# EAGLE board BasePCB_V_1_0 (EAGLE 9.5.2)

Size 100 x 100 mm. Coordinates in mm from the lower left corner, seen from the top.
Outline: 0,0 100,0 100,100 0,100 0,0
Copper layers (1*16): Top 0.035mm / dielectric 1.5mm / Bottom 0.035mm
Design rules "default": minimum track width 6mil, minimum drill 0.35mm, track to track 6mil, track to pad 6mil, pad to pad 6mil, via to via 6mil, smd to smd 6mil, copper to edge 40mil, drill to drill 6mil, minimum pad ring 10mil, minimum via ring 8mil, stop-mask expansion 4mil, vias tented up to drill 0mil, thermal gap 10mil
Holes 4 mm at 4,4 5.4,95.1 93.4,96.3 91.8,3.6

## Footprints (pad centres in the part's own frame; a part is rotated, then mirrored left to right if it is on the bottom)
C1206 = smd 0.62 x 1.82: 1 -1.6,0; 2 1.6,0
C0603 = smd 1.1 x 1: 1 -0.85,0; 2 0.85,0
MOLEX_90814-0204 = smd 1.194 x 2.007: 1 0.254,0; 2 1.27,5.994; 3 2.54,0; 4 3.81,5.994 | drill 1.753 pad 2.629: 5 -1.93,1.092; 6 5.74,1.092
QFP80P900X900X160-32N = smd 1.475 x 0.6: 1 -4.238,2.8; 2 -4.238,2; 3 -4.238,1.2; 4 -4.238,0.4; 5 -4.238,-0.4; 6 -4.238,-1.2; 7 -4.238,-2; 8 -4.238,-2.8; 17 4.238,-2.8; 18 4.238,-2; 19 4.238,-1.2; 20 4.238,-0.4; 21 4.238,0.4; 22 4.238,1.2; 23 4.238,2; 24 4.238,2.8 | smd 0.6 x 1.475: 9 -2.8,-4.238; 10 -2,-4.238; 11 -1.2,-4.238; 12 -0.4,-4.238; 13 0.4,-4.238; 14 1.2,-4.238; 15 2,-4.238; 16 2.8,-4.238; 25 2.8,4.238; 26 2,4.238; 27 1.2,4.238; 28 0.4,4.238; 29 -0.4,4.238; 30 -1.2,4.238; 31 -2,4.238; 32 -2.8,4.238
SOP50P490X110-10N = smd 1.4 x 0.3: 1 -2.2,1; 2 -2.2,0.5; 3 -2.2,0; 4 -2.2,-0.5; 5 -2.2,-1; 6 2.2,-1; 7 2.2,-0.5; 8 2.2,0; 9 2.2,0.5; 10 2.2,1
1001878410210TLF = drill 0.78 pad 1.337: A1 0,1.27; A2 1,3.27; A3 2,1.27; A4 3,3.27; A5 4,1.27; A6 5,3.27; A7 6,1.27; A8 7,3.27; A9 8,1.27; A10 9,3.27; A11 10,1.27; A12 13,3.27; A13 14,1.27; A14 15,3.27; A15 16,1.27; A16 17,3.27; A17 18,1.27; A18 19,3.27; B1 0,-1.23; B2 1,-3.23; B3 2,-1.23; B4 3,-3.23; B5 4,-1.23; B6 5,-3.23; B7 6,-1.23; B8 7,-3.23; B9 8,-1.23; B10 9,-3.23; B11 10,-1.23; B12 13,-3.23; B13 14,-1.23; B14 15,-3.23; B15 16,-1.23; B16 17,-3.23; B17 18,-1.23; B18 19,-3.23 | hole 2.4: 11.65,0.02; 20.8,0.02
R0603 = smd 1 x 1.1: 1 -0.85,0; 2 0.85,0

## Placement (x,y rotation side)
C15  10 uF  [C1206]  -64.6,-625.1 0 top  (outside the outline)
C16  100 nF  [C0603]  -88.9,-591 0 top  (outside the outline)
C17  100 nF  [C0603]  -88.9,-487.68 0 top  (outside the outline)
C18  10 uF  [C1206]  -68.58,-473.71 0 top  (outside the outline)
C20  10 uF  [C1206]  -86.5,-514.8 0 top  (outside the outline)
C21  100 nF  [C0603]  -88.9,-518 0 top  (outside the outline)
C22  10 uF  [C1206]  -87.6,-526.3 0 top  (outside the outline)
C23  100 nF  [C0603]  -88.9,-522.6 0 top  (outside the outline)
C24  10 uF  [C1206]  -87.6,-546.8 0 top  (outside the outline)
C25  100 nF  [C0603]  -82.7,-534.5 0 top  (outside the outline)
C26  10 uF  [C1206]  -82,-546.8 0 top  (outside the outline)
C27  100 nF  [C0603]  -88.9,-539.4 0 top  (outside the outline)
C28  10 uF  [C1206]  -87.6,-567.3 0 top  (outside the outline)
C29  100 nF  [C0603]  -82.7,-555 0 top  (outside the outline)
C30  10 uF  [C1206]  -82,-567.3 0 top  (outside the outline)
C31  100 nF  [C0603]  -88.9,-559.9 0 top  (outside the outline)
C32  10 uF  [C1206]  -87.6,-587.8 0 top  (outside the outline)
C33  100 nF  [C0603]  -82.7,-575.5 0 top  (outside the outline)
C34  10 uF  [C1206]  -82,-587.8 0 top  (outside the outline)
C35  100 nF  [C0603]  -88.9,-580.4 0 top  (outside the outline)
C36  100 nF  [C0603]  -76.5,-605.4 0 top  (outside the outline)
C37  10 uF  [C1206]  -87.6,-628.8 0 top  (outside the outline)
C38  100 nF  [C0603]  -70.7,-605.4 0 top  (outside the outline)
C39  10 uF  [C1206]  -82,-628.8 0 top  (outside the outline)
C40  100 nF  [C0603]  -64.9,-605.4 0 top  (outside the outline)
C41  10 uF  [C1206]  -76.4,-628.8 0 top  (outside the outline)
C42  100 nF  [C0603]  -88.9,-610.3 0 top  (outside the outline)
C43  10 uF  [C1206]  -70.8,-628.8 0 top  (outside the outline)
C44  100 nF  [C0603]  -83.1,-610.3 0 top  (outside the outline)
C45  10 uF  [C1206]  -65.2,-628.8 0 top  (outside the outline)
C46  100 nF  [C0603]  -77.3,-610.3 0 top  (outside the outline)
C47  10 uF  [C1206]  -87.6,-631.1 0 top  (outside the outline)
C48  100 nF  [C0603]  -71.5,-610.3 0 top  (outside the outline)
C49  10 uF  [C1206]  -82,-631.1 0 top  (outside the outline)
C50  100 nF  [C0603]  -65.7,-610.3 0 top  (outside the outline)
I2C-CONN  90814-0204  [MOLEX_90814-0204]  -81.28,-435.61 0 top  (outside the outline)
IC6  STM32F031K6T6  [QFP80P900X900X160-32N]  -82.55,-466.09 0 top  (outside the outline)
IC7  DAC084S085CIMM_NOPB  [SOP50P490X110-10N]  -78.9,-497 0 top  (outside the outline)
IC8  DAC084S085CIMM_NOPB  [SOP50P490X110-10N]  -78.9,-543.7 0 top  (outside the outline)
IC9  DAC084S085CIMM_NOPB  [SOP50P490X110-10N]  -78.9,-564.2 0 top  (outside the outline)
IC10  DAC084S085CIMM_NOPB  [SOP50P490X110-10N]  -78.9,-584.7 0 top  (outside the outline)
IC11  DAC084S085CIMM_NOPB  [SOP50P490X110-10N]  29.1,27.2 0 top
IC12  DAC084S085CIMM_NOPB  [SOP50P490X110-10N]  44.2,43.9 0 top
IC13  DAC084S085CIMM_NOPB  [SOP50P490X110-10N]  44.2,40.2 0 top
IC15  DAC084S085CIMM_NOPB  [SOP50P490X110-10N]  44.2,36.5 0 top
J1  90814-0204  [MOLEX_90814-0204]  -66.04,-246.38 0 top  (outside the outline)
J2  90814-0204  [MOLEX_90814-0204]  -66.04,-264.16 0 top  (outside the outline)
J3  10018784-10210TLF  [1001878410210TLF]  60,75 90 top
J4  10018784-10210TLF  [1001878410210TLF]  40,75 90 top
J5  10018784-10210TLF  [1001878410210TLF]  40,25 270 top
J6  10018784-10210TLF  [1001878410210TLF]  20,75 90 top
J7  10018784-10210TLF  [1001878410210TLF]  20,25 270 top
J8  10018784-10210TLF  [1001878410210TLF]  80,25 270 top
J9  10018784-10210TLF  [1001878410210TLF]  60,25 270 top
J10  10018784-10210TLF  [1001878410210TLF]  80,75 90 top
PRG-CONN  90814-0204  [MOLEX_90814-0204]  -81.28,-453.39 0 top  (outside the outline)
R36  10k  [R0603]  -72.39,-463.55 0 top  (outside the outline)
R37  10k  [R0603]  -67.31,-463.55 0 top  (outside the outline)
R39  10k  [R0603]  -88.9,-492.76 0 top  (outside the outline)
R42  500 R  [R0603]  -88.9,-501.3 0 top  (outside the outline)
R45  500 R  [R0603]  -88.9,-506.2 0 top  (outside the outline)
R46  500 R  [R0603]  -88.9,-511.1 0 top  (outside the outline)
R47  500 R  [R0603]  -88.9,-529.9 0 top  (outside the outline)
R48  500 R  [R0603]  -82.7,-529.9 0 top  (outside the outline)
R49  500 R  [R0603]  -88.9,-534.8 0 top  (outside the outline)
R50  500 R  [R0603]  -88.9,-550.4 0 top  (outside the outline)
R51  500 R  [R0603]  -82.7,-550.4 0 top  (outside the outline)
R52  500 R  [R0603]  -88.9,-555.3 0 top  (outside the outline)
R53  500 R  [R0603]  -88.9,-570.9 0 top  (outside the outline)
R54  500 R  [R0603]  -82.7,-570.9 0 top  (outside the outline)
R55  500 R  [R0603]  -88.9,-575.8 0 top  (outside the outline)
R56  500 R  [R0603]  -88.9,-595.9 0 top  (outside the outline)
R57  500 R  [R0603]  -82.7,-595.9 0 top  (outside the outline)
R62  500 R  [R0603]  -76.5,-595.9 0 top  (outside the outline)
R64  500 R  [R0603]  -70.3,-595.9 0 top  (outside the outline)
R65  500 R  [R0603]  -64.1,-595.9 0 top  (outside the outline)
R66  500 R  [R0603]  -88.9,-600.8 0 top  (outside the outline)
R69  500 R  [R0603]  -82.7,-600.8 0 top  (outside the outline)
R71  500 R  [R0603]  -76.5,-600.8 0 top  (outside the outline)
R73  500 R  [R0603]  -70.3,-600.8 0 top  (outside the outline)
R74  500 R  [R0603]  -64.1,-600.8 0 top  (outside the outline)
R75  500 R  [R0603]  -88.9,-605.7 0 top  (outside the outline)
R76  500 R  [R0603]  -82.7,-605.7 0 top  (outside the outline)

## Library data of the parts
C15-C18 C20-C50 R36 R37 R39 R42 R45-R57 R62 R64-R66 R69 R71 R73-R76 = passive components
I2C-CONN J1 J2 PRG-CONN = electro_mechanical; DESCRIPTION: CONN HEADER 4POS 1.27MM SMD TIN; HEIGHT: mm; MANUFACTURER_NAME: Molex; MANUFACTURER_PART_NUMBER: 90814-0204; MOUSER_PART_NUMBER: 538-90814-0204; MOUSER_PRICE-STOCK: https://www.mouser.com/Search/Refine.aspx?Keyword=538-90814-0204
IC6 = C_Sager_Bibliothek; DESCRIPTION: ARM Microcontrollers - MCU 16/32-BITS MICROS; HEIGHT: 1.6mm; MANUFACTURER_NAME: STMicroelectronics; MANUFACTURER_PART_NUMBER: STM32F031K6T6; MOUSER_PART_NUMBER: 511-STM32F031K6T6; MOUSER_PRICE-STOCK: https://www.mouser.com/Search/Refine.aspx?Keyword=511-STM32F031K6T6
IC7-IC13 IC15 = SPI; MOUSER_PART_NUMBER: 926-DAC084S085CIMMNO
J3-J10 = electro_mechanical; DESCRIPTION: PCI Express / PCI Connectors 36P CARD EDGE ASSM VERTICAL; HEIGHT: 11.25mm; MANUFACTURER_NAME: Amphenol; MANUFACTURER_PART_NUMBER: 10018784-10210TLF; MOUSER_PART_NUMBER: 649-1001878410210TLF; MOUSER_PRICE-STOCK: https://www.mouser.com/Search/Refine.aspx?Keyword=649-1001878410210TLF

## Nets
+3V3: C16.1 C17.1 C18.1 I2C-CONN.3 IC6.1 IC6.5 IC6.17
+5V: C15.1 C20.1 C21.1 C22.1 C23.1 C24.1 C25.1 C26.1 C27.1 C28.1 C29.1 C30.1 C31.1 C32.1 C33.1 C34.1 C35.1 C36.1 C37.1 C38.1 C39.1 C40.1 C41.1 C42.1 C43.1 C44.1 C45.1 C46.1 C47.1 C48.1 C49.1 C50.1 IC7.1 IC7.7 IC8.1 IC8.7 IC9.1 IC9.7 IC10.1 IC10.7 IC11.1 IC11.7 IC12.1 IC12.7 IC13.1 IC13.7 IC15.1 IC15.7
ADRR.1: IC6.2 R39.2
ADRR.2: IC6.3 R36.2
BOOT_0: IC6.31 R37.2
GND: C15.2 C16.2 C17.2 C18.2 C20.2 C21.2 C22.2 C23.2 C24.2 C25.2 C26.2 C27.2 C28.2 C29.2 C30.2 C31.2 C32.2 C33.2 C34.2 C35.2 C36.2 C37.2 C38.2 C39.2 C40.2 C41.2 C42.2 C43.2 C44.2 C45.2 C46.2 C47.2 C48.2 C49.2 C50.2 I2C-CONN.4 IC6.16 IC6.32 IC7.6 IC8.6 IC9.6 IC10.6 IC11.6 IC12.6 IC13.6 IC15.6 J1.3 J1.4 PRG-CONN.4 R36.1 R37.1 R39.1
I2C1_SCL: I2C-CONN.2 IC6.29
I2C1_SDA: I2C-CONN.1 IC6.20
L-IN: J2.3
L-OUT: J2.4
N$1: J9.B18
N$2: J4.B18
N$3: J3.B18
N$4: J8.B18
N$5: J7.B18
N$6: J5.B18
N$7: J6.B18
N$31: IC7.8 R42.1
N$32: IC7.9 R45.1
N$33: IC7.10 R46.1
N$34: IC7.2
N$35: IC7.3
N$36: IC7.4
N$37: IC7.5
N$38: IC8.8 R47.1
N$39: IC8.9 R48.1
N$40: IC8.10 R49.1
N$41: IC8.2
N$42: IC8.3
N$43: IC8.4
N$44: IC8.5
N$45: IC9.8 R50.1
N$46: IC9.9 R51.1
N$47: IC9.10 R52.1
N$48: IC9.2
N$49: IC9.3
N$50: IC9.4
N$51: IC9.5
N$52: IC10.8 R53.1
N$53: IC10.9 R54.1
N$54: IC10.10 R55.1
N$55: IC10.2
N$59: IC10.3
N$60: IC10.4
N$61: IC10.5
N$62: IC11.8 R56.1
N$63: IC11.9 R57.1
N$64: IC11.10 R62.1
N$65: IC11.2
N$68: IC11.3
N$69: IC11.4
N$70: IC11.5
N$71: IC12.8 R64.1
N$72: IC12.9 R65.1
N$73: IC12.10 R66.1
N$75: IC12.2
N$76: IC12.3
N$77: IC12.4
N$78: IC12.5
N$79: IC13.8 R69.1
N$80: IC13.9 R71.1
N$81: IC13.10 R73.1
N$82: IC13.2
N$83: IC13.3
N$84: IC13.4
N$85: IC13.5
N$86: IC15.8 R74.1
N$87: IC15.9 R75.1
N$88: IC15.10 R76.1
N$89: IC15.2
N$90: IC15.3
N$91: IC15.4
N$92: IC15.5
NRST: IC6.4 PRG-CONN.2
R-IN: J2.1
R-OUT: J2.2
SWCLK: IC6.24 PRG-CONN.1
SWDIO: IC6.23 PRG-CONN.3
V+: J1.1 J3.A1 J3.B1 J4.A1 J4.B1 J5.A1 J5.B1 J6.A1 J6.B1 J7.A1 J7.B1 J8.A1 J8.B1 J9.A1 J9.B1 J10.A1 J10.B1
V-: J1.2 J3.A18 J4.A18 J5.A18 J6.A18 J7.A18 J8.A18 J9.A18 J10.A18 J10.B18

## Tracks (layer width: path | path; a pad name or v marks a point on that pad's centre or on a via)
+3V3  (6 unrouted)
+5V  (47 unrouted)
ADRR.1  (1 unrouted)
ADRR.2  (1 unrouted)
BOOT_0  (1 unrouted)
GND  (51 unrouted)
I2C1_SCL  (1 unrouted)
I2C1_SDA  (1 unrouted)
N$31  (1 unrouted)
N$32  (1 unrouted)
N$33  (1 unrouted)
N$38  (1 unrouted)
N$39  (1 unrouted)
N$40  (1 unrouted)
N$45  (1 unrouted)
N$46  (1 unrouted)
N$47  (1 unrouted)
N$52  (1 unrouted)
N$53  (1 unrouted)
N$54  (1 unrouted)
N$62  (1 unrouted)
N$63  (1 unrouted)
N$64  (1 unrouted)
N$71  (1 unrouted)
N$72  (1 unrouted)
N$73  (1 unrouted)
N$79  (1 unrouted)
N$80  (1 unrouted)
N$81  (1 unrouted)
N$86  (1 unrouted)
N$87  (1 unrouted)
N$88  (1 unrouted)
NRST  (1 unrouted)
SWCLK  (1 unrouted)
SWDIO  (1 unrouted)
V+  (16 unrouted)
V-  (9 unrouted)